# Altium PCB REMOTER.PcbDoc
Units mil, origin at the board's own origin, x right, y up, seen from the top; angles counter-clockwise.
Board outline 4330.71 x 2559.06 mil, 2 copper layers (Top Layer, Bottom Layer); 27 components, 20 nets, 135 pads, 44 vias.
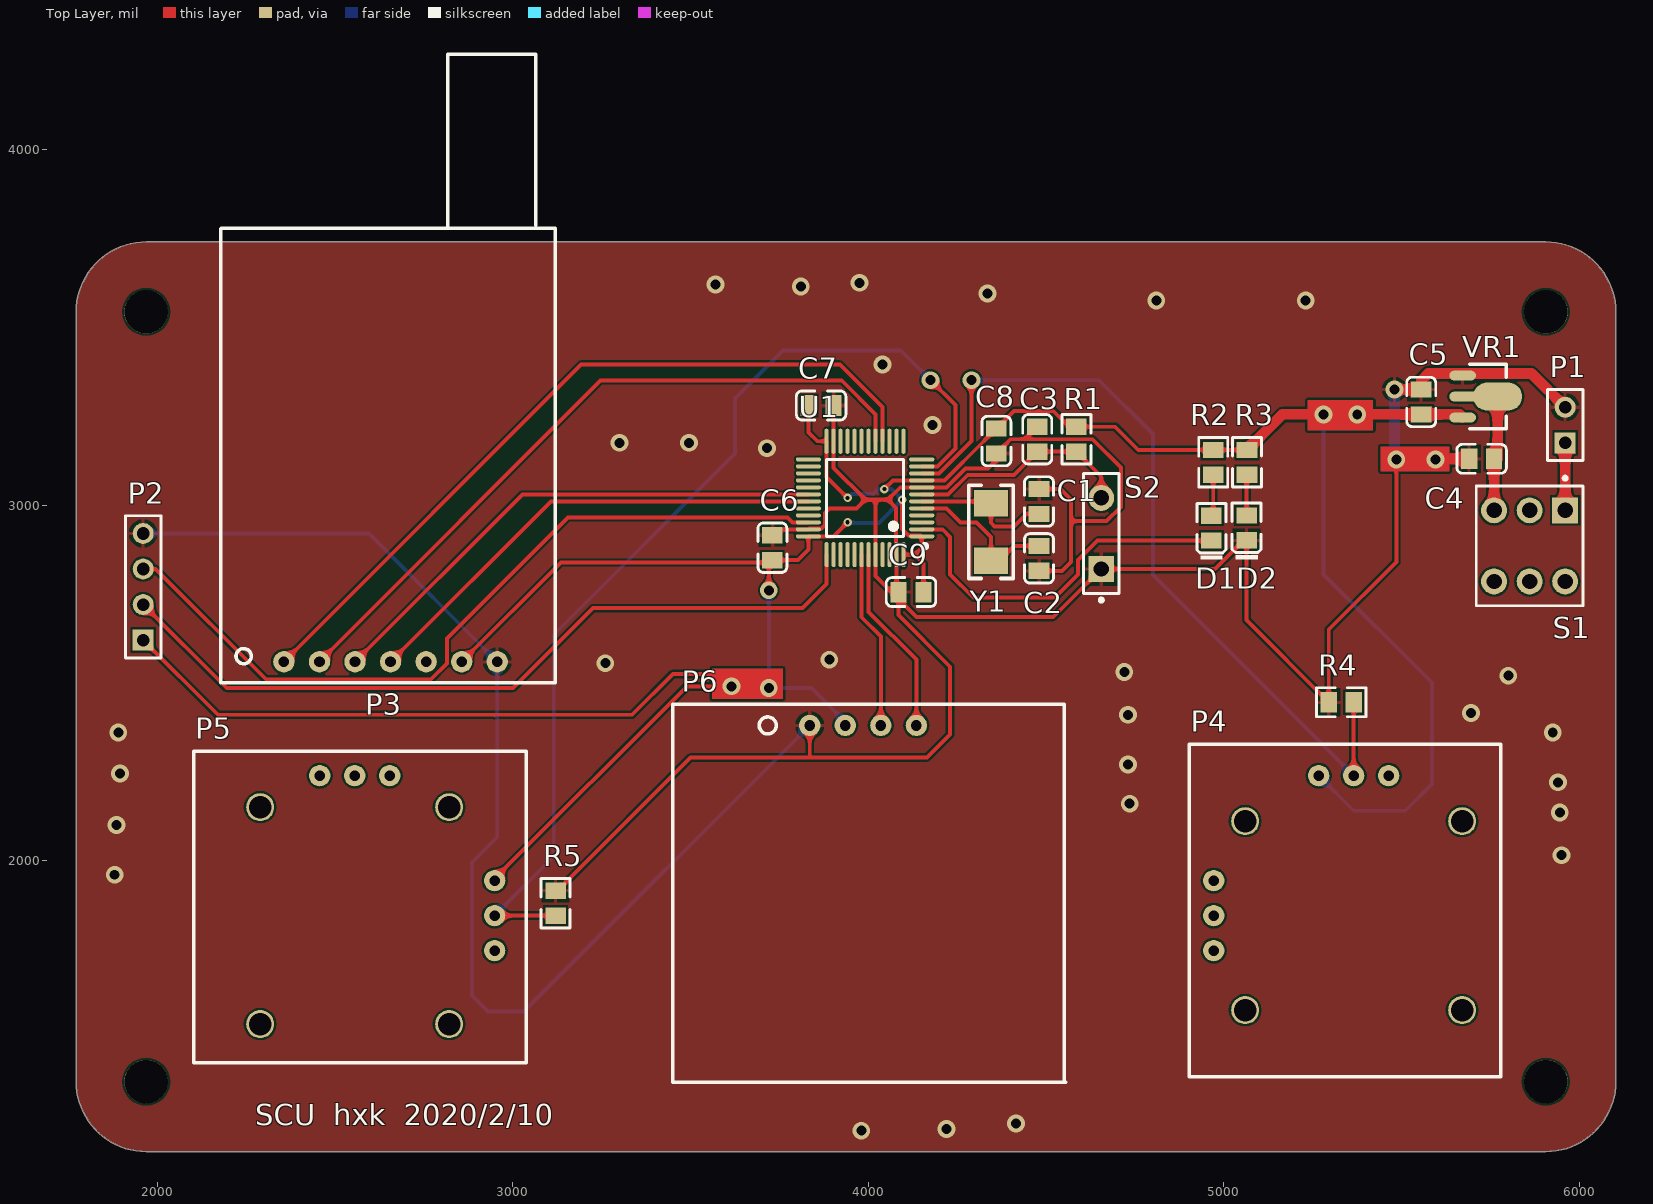
[diagram p0: Top Layer view]
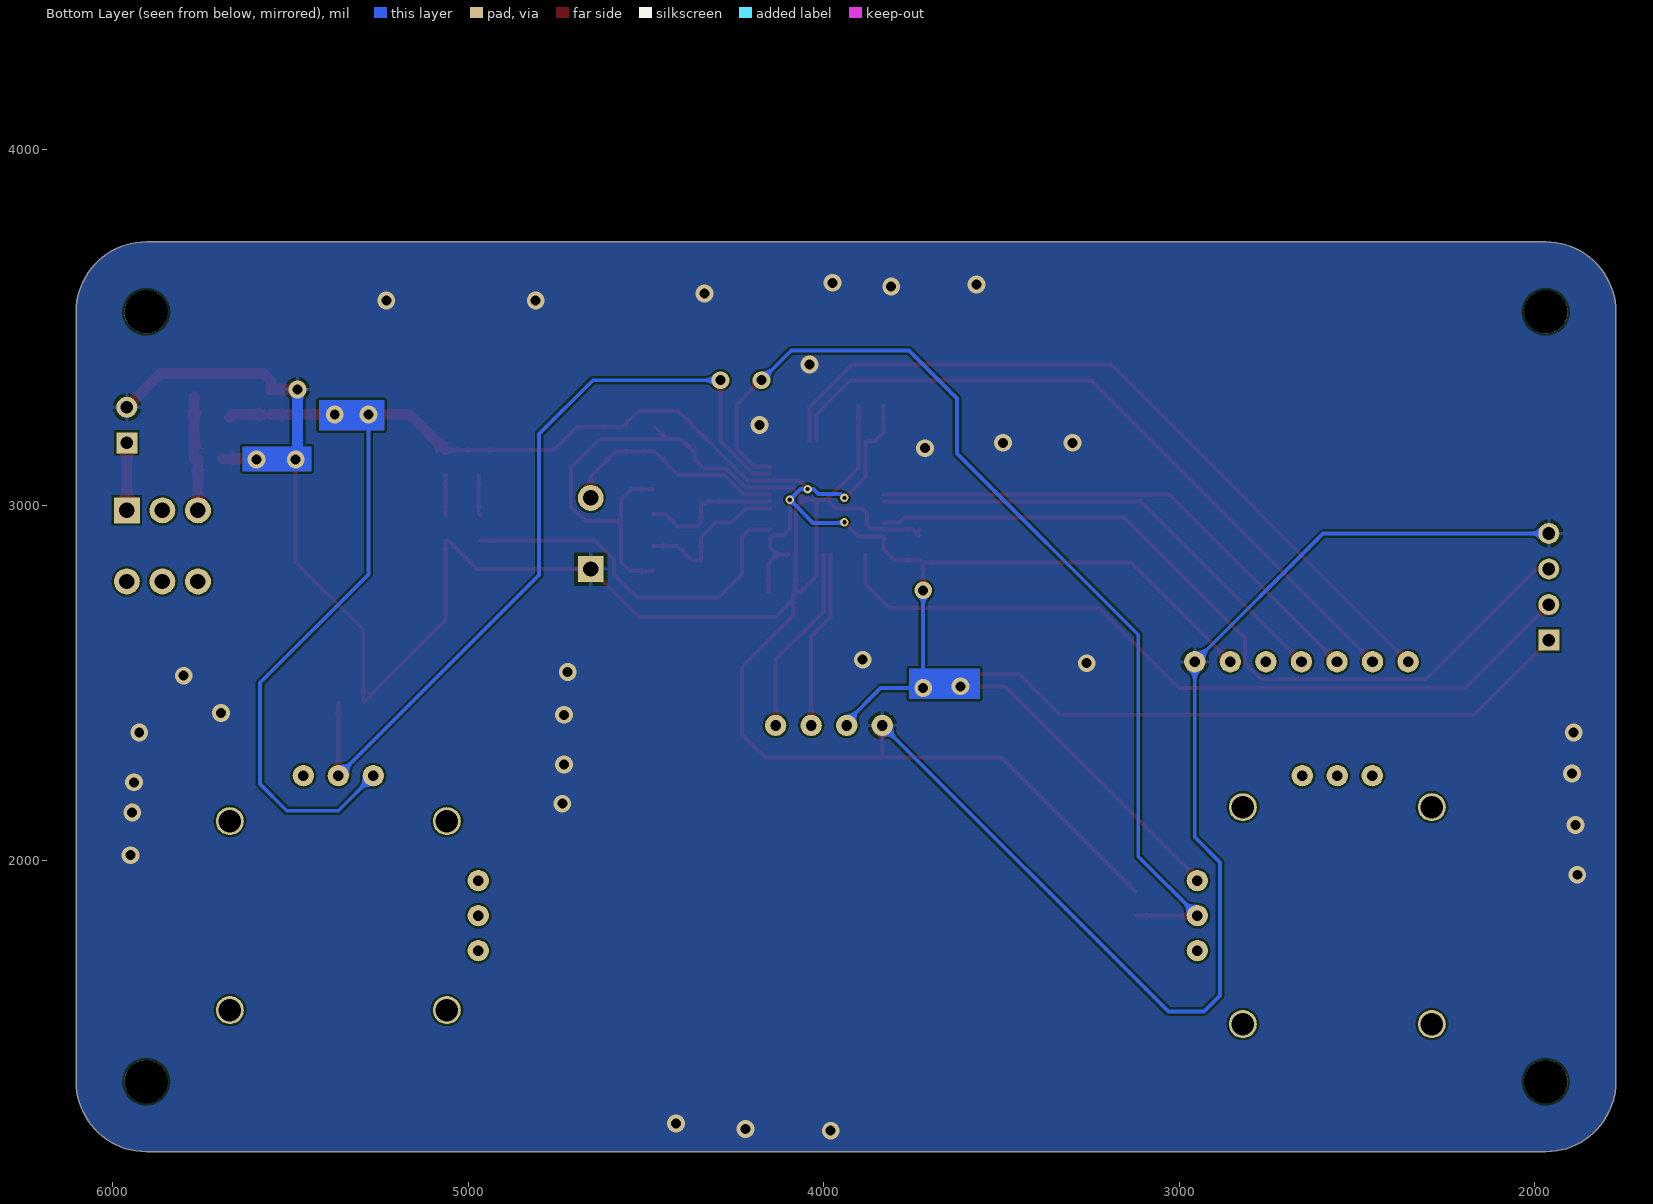
[diagram p1: Bottom Layer view, seen from below]
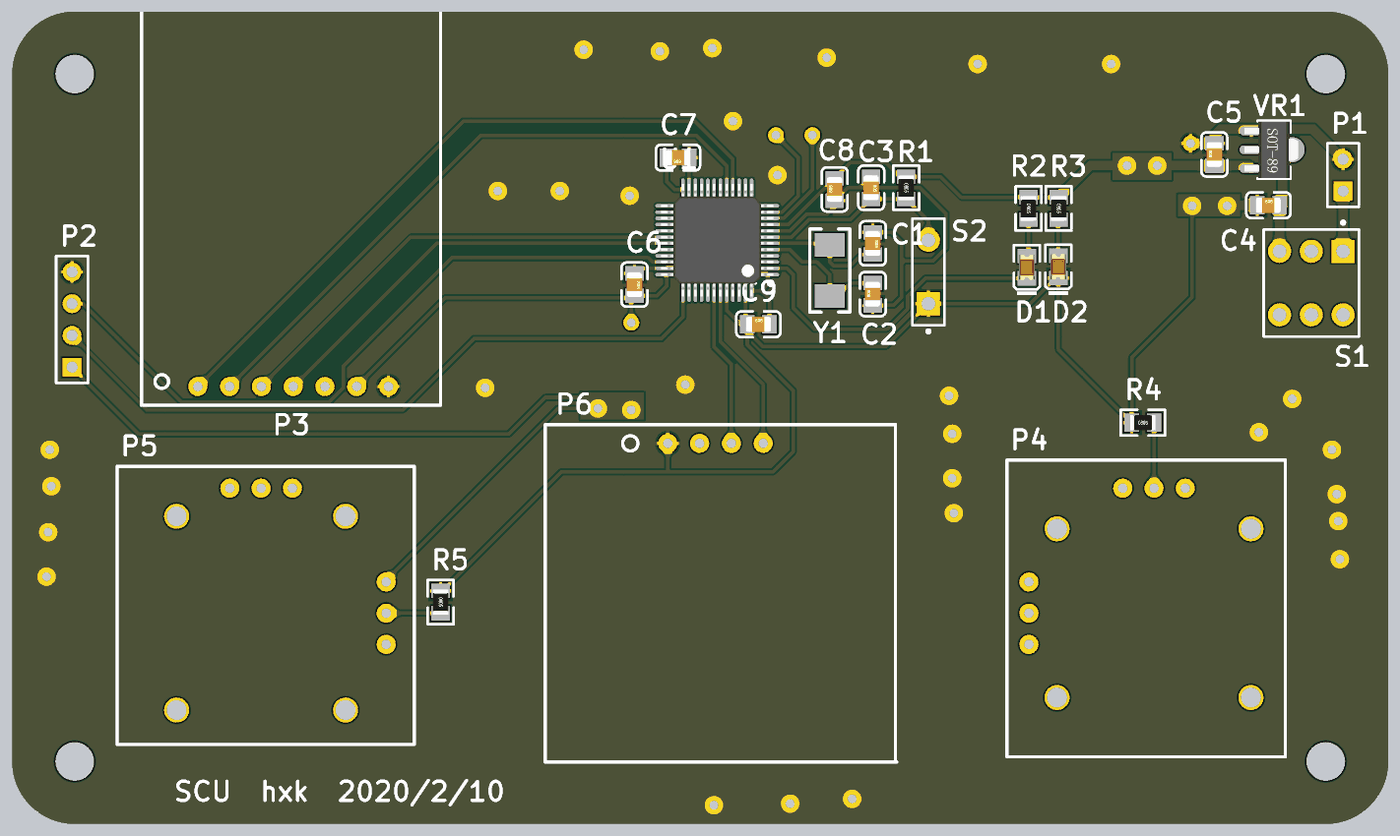
[diagram p2: 3D render of the assembled board from above, using the file's embedded part models]

## Layer stack, top to bottom
Top Solder: solder mask 0.4, Solder Resist, Dk 3.5
Top Layer: signal copper 1.4
Dielectric 1: dielectric 12.6, FR-4, Dk 4.8
Bottom Layer: signal copper 1.4
Bottom Solder: solder mask 0.4, Solder Resist, Dk 3.5

## Board outline
1771.65,1377.95 ccw(c1968.5,1377.95) 1968.5,1181.1 5905.51,1181.1 ccw(c5905.51,1377.95) 6102.36,1377.95 6102.36,3543.31 ccw(c5905.51,3543.31) 5905.51,3740.16 1968.5,3740.16 ccw(c1968.5,3543.31) 1771.65,3543.31

## Design rules (kind name [scope] priority, off if disabled: settings)
Clearance [All] p1: gap=6 ignorepadtopadclearanceinfootprint=FALSE except(0: Arc-Hole Track-Hole SMDPad-Hole THPad-Hole Via-Hole Fill-Hole Poly-Hole Region-Hole Text-Hole)
PolygonConnect [All] p1: connectstyle=Relief reliefconductorwidth=10 reliefentries=4 polygonreliefangle="90 Angle" airgapwidth=10
RoutingVias [All] p1: holewidth=28 width=50 viastyle="Through Hole" minholewidth=28 minwidth=50 maxholewidth=28 maxwidth=50
SolderMaskExpansion [All] p1: expansion=4
Width PWR [InNetClass('PWR')] p1: maxlimit=40 minlimit=8 preferedwidth=30 minimp=50.000000 maximp=50.000000 favimp=50.000000
Width [All] p2: maxlimit=30 minlimit=6 preferedwidth=11 minimp=50.000000 maximp=50.000000 favimp=50.000000
30 further rules are at their usual default settings.

## Components (designator, comment, footprint, x,y, rotation, side; value= is the part's Value field where it differs from the comment)
C1 "22pF (220) 5% 50V" 0805_C 4480,3009.96 r270 top
C2 "22pF (220) 5% 50V" 0805_C 4480,2849.96 r90 top
C3 "100nF(104) 10% 50V" 0805_C 4475,3185.04 r270 top
C4 "10uF (106) 10% 25V" 0805_C 5724.96,3130 r0 top
C5 "10uF (106) 10% 25V" 0805_C 5555,3289.96 r90 top
C6 "100nF(104) 10% 50V" 0805_C 3730,2879.96 r270 top
C7 "100nF(104) 10% 50V" 0805_C 3866.93,3280 r180 top
C8 "100nF(104) 10% 50V" 0805_C 4360,3179.96 r90 top
C9 "100nF(104) 10% 50V" 0805_C 4119.96,2755 r0 top
D1 "蓝灯 0805" 0805_LED_S1 4965,2934.96 r90 top
D2 "红灯 0805" 0805_LED_S1 5063.9,2935.72 r90 top
P1 "Battery" HDR1X2 5960,3175 r90 top
P2 "ST-LINK" HDR1X4 1960,2620 r90 top
P3 "LORA" LORA 2655.91,2559.06 r0 top
P4 "ROCKER" ROCKER 5365,1845 r270 top
P5 "ROCKER" ROCKER 2555,1845 r180 top
P6 "OLED" OLED 3835,2380 r180 top
R1 "10KΩ (1002) ±1%" 0805_R 4585,3185.04 r270 top
R2 "1KΩ (1001) ±1%" 0805_R 4970,3120.04 r270 top
R3 "1KΩ (1001) ±1%" 0805_R 5065,3120.04 r270 top
R4 "10KΩ (1002) ±1%" 0805_R 5329.96,2445 r0 top
R5 "10KΩ (1002) ±1%" 0805_R 3120,1880.04 r270 top
S1 "SW-DPDT" DPDT-6 5860,2885 r270 top
S2 "SW-PB" SPST-2 4655,2920 r90 top
U1 "STM32F103C8T6" LQFP-48_7x7x05P 3990.55,3020 r90 top
VR1 "HT7533-1" SOT-89(SOT-89-3) 5671.57,3305 r180 top
Y1 "8MHz ±20ppm 20pF" SMD-5032_2P 4344.92,2924.29 r270 top

## Footprints (in the part's own frame and the unit in brackets; to place one, negate y for a bottom-side part, rotate by r counter-clockwise, add the part's x,y. Pads: shape width x height; smd on the part's side, far side on the other; paste and mask are expansions set on the pad)
0805_C [mm]
  rect 1.16x1.47 smd: 1(-0.89,0) 2(0.89,0)
  silkscreen extent -1.77,-1.04 1.77,1.04, body extent -1,-0.62 1,0.63, height 0.77
0805_LED_S1 [mm]
  rect 1.16x1.47 smd: A(0.89,0) K(-0.89,0)
  silkscreen extent -2.24,-1.04 1.77,1.03, body extent -1.01,-0.62 1.01,0.62, height 1.1
0805_R [mm]
  rect 1.16x1.47 smd: 1(-0.89,0) 2(0.89,0)
  silkscreen extent -1.77,-1.04 1.77,1.03, body extent -1,-0.62 1,0.63, height 0.49
DPDT-6 [mm] "Switch; 6 Leads"
  rect 1.85x1.85 hole 1.1: 1(-2.54,2.54)
  round 1.85 hole 1.1: 2(-2.54,0) 3(-2.54,-2.54) 4(2.54,-2.54) 5(2.54,0) 6(2.54,2.54)
  silkscreen extent -4.96,-3.81 4.28,3.81
HDR1X2 [mm] "Connector; Header; 2 Position"
  rect 1.5x1.5 hole 0.9: 1(0,0)
  round 1.5 hole 0.9: 2(2.54,0)
  silkscreen extent -1.27,-1.27 3.81,1.27
HDR1X4 [mm] "Connector; Header; 4 Position"
  rect 1.5x1.5 hole 0.9: 1(0,0)
  round 1.5 hole 0.9: 2(2.54,0) 3(5.08,0) 4(7.62,0)
  silkscreen extent -1.27,-1.27 8.89,1.27
LORA [mil]
  round 60 hole 30: 1(-300,0) 2(-200,0) 3(-100,0) 4(0,0) 5(100,0) 6(200,0) 7(300,0)
  silkscreen extent -477,-59 464,1709
LQFP-48_7x7x05P [mm]
  oval 0.28x1.8 smd mask+0.051: 1(-2.75,-4.05) 2(-2.25,-4.05) 3(-1.75,-4.05) 4(-1.25,-4.05) 5(-0.75,-4.05) 6(-0.25,-4.05) 7(0.25,-4.05) 8(0.75,-4.05) 9(1.25,-4.05) 10(1.75,-4.05) 11(2.25,-4.05) 12(2.75,-4.05) 25(2.75,4.05) 26(2.25,4.05) 27(1.75,4.05) 28(1.25,4.05) 29(0.75,4.05) 30(0.25,4.05) 31(-0.25,4.05) 32(-0.75,4.05) 33(-1.25,4.05) 34(-1.75,4.05) 35(-2.25,4.05) 36(-2.75,4.05)
  oval 1.8x0.28 smd mask+0.051: 13(4.05,-2.75) 14(4.05,-2.25) 15(4.05,-1.75) 16(4.05,-1.25) 17(4.05,-0.75) 18(4.05,-0.25) 19(4.05,0.25) 20(4.05,0.75) 21(4.05,1.25) 22(4.05,1.75) 23(4.05,2.25) 24(4.05,2.75) 37(-4.05,2.75) 38(-4.05,2.25) 39(-4.05,1.75) 40(-4.05,1.25) 41(-4.05,0.75) 42(-4.05,0.25) 43(-4.05,-0.25) 44(-4.05,-0.75) 45(-4.05,-1.25) 46(-4.05,-1.75) 47(-4.05,-2.25) 48(-4.05,-2.75)
  silkscreen extent -3.6,-4.42 2.75,2.75, body extent -4.5,-4.5 4.5,4.5, height 1.6
OLED [mil]
  round 60 hole 30: 1(0,0) 2(-100,0) 3(-200,0) 4(-300,0)
  silkscreen extent -720,-59 386,1004
ROCKER [mm]
  round 1.524 hole 0.762: 1(-10,-2.5) 2(-10,0) ""(-10,2.5) ""(-2.5,-10) ""(0,-10) ""(2.5,-10)
  round 2 hole 1.6: ""(-6.75,7.75) ""(-6.75,-7.75) ""(6.75,7.75) ""(6.75,-7.75)
  silkscreen extent -12.25,-11.75 11.5,10.5
SMD-5032_2P [mm]
  rect 1.9x2.4 smd: 1(-2.05,0) 2(2.05,0)
  silkscreen extent -3.32,-1.6 3.32,1.6
SOT-89(SOT-89-3) [mm]
  oval 1.9x0.7 smd: 1(0,-1.5) 3(0,1.5)
  oval 3.5x2 smd: 2(-2.5,0)
  oval 2.1x0.7 smd: 2(-0.1,0)
  silkscreen extent -3.1,-2.3 -0.5,2.3, body extent -3.75,-2.25 0.55,2.25, height 1.51
SPST-2 [mm] "Switch; 2 Leads"
  rect 1.85x1.85 hole 1.1: 1(-2.54,0)
  round 1.85 hole 1.1: 2(2.54,0)
  silkscreen extent -4.89,-1.27 4.28,1.27

## Part data
C1 C2: library part "0805 22pF (220) 5% 50V", "贴片电容", Package=0805, SuppliersPartNumber=C1804, ComponentLink1Description=供应商, ComponentLink1URL=http://www.szlcsc.com/product/details_2156.html, Supplier=LC
C3 C6 C7 C8 C9: library part "0805 100nF(104) 10% 50V", "贴片电容", Package=0805, SuppliersPartNumber=C49678, ComponentLink1Description=供应商, ComponentLink1URL=http://www.szlcsc.com/product/details_50686.html, Supplier=LC
C4 C5: library part "0805 10uF (106) 10% 25V", "贴片电容", Package=0805, SuppliersPartNumber=C15850, ComponentLink1Description=供应商, ComponentLink1URL=http://www.szlcsc.com/product/details_16532.html, Supplier=LC
D1: library part "0805 蓝灯", "发光二极管", Package=0805, SuppliersPartNumber=C2293, ComponentLink1Description=供应商, ComponentLink1URL=http://www.szlcsc.com/product/details_2666.html, Supplier=LC
D2: library part "0805 红灯", "发光二极管", Package=0805, SuppliersPartNumber=C2295, ComponentLink1Description=供应商, ComponentLink1URL=http://www.szlcsc.com/product/details_2668.html, Supplier=LC
P1: library part "Header 2", "Header, 2-Pin", LatestRevisionDate=17-Jul-2002, LatestRevisionNote="Re-released for DXP Platform.", Publisher="Altium Limited"
P2: library part "Header 4", "Header, 4-Pin", LatestRevisionDate=17-Jul-2002, LatestRevisionNote="Re-released for DXP Platform.", Publisher="Altium Limited"
R1 R4 R5: library part "0805 10KΩ (1002) 1%", "贴片电阻", Package=0805, SuppliersPartNumber=C17414, ComponentLink1Description=供应商, ComponentLink1URL=http://www.szlcsc.com/product/details_18102.html, Supplier=LC
R2 R3: library part "0805 1KΩ (1001) 1%", "贴片电阻", Package=0805, SuppliersPartNumber=C17513, ComponentLink1Description=供应商, ComponentLink1URL=http://www.szlcsc.com/product/details_18201.html, Supplier=LC
S1: "Double-Pole, Double-Throw Switch", LatestRevisionDate=17-Jul-2002, LatestRevisionNote="Re-released for DXP Platform.", PackageDescription="Switch; 6 Leads", PackageReference=DPDT-6, Published=24-Mar-1999, Publisher="Altium Limited"
S2: "Switch", LatestRevisionDate=17-Jul-2002, LatestRevisionNote="Re-released for DXP Platform.", PackageDescription="Switch; 2 Leads", PackageReference=SPST-2, Published=24-Mar-1999, Publisher="Altium Limited"
U1: "ARM Cortex-M3 32-bit MCU, 64 KB Flash, 20 KB Internal RAM, 37 I/Os, 48-pin LQFP, -40 to 85 degC, Tray", I/Os (High Current)=37, Operating Frequency(F) (Processor speed) (MHz)=72, Supplier Part Number 1=497-6063-ND, Supply Voltage(Vcc) min (V)=2, A/D Converter="2x12-bit (10 Channel)", ComponentLink1Description="Manufacturer URL", ComponentLink1URL=http://www.st.com/web/en/home.html, ComponentLink2Description=Datasheet, ComponentLink2URL=http://www.st.com/st-web-ui/static/active/en/resource/technical/document/datasheet/CD00161566.pdf, ComponentLink3Description="Package Specification", ComponentLink3URL=http://www.st.com/st-web-ui/static/active/en/resource/technical/document/datasheet/DM00058181.pdf, Core="ARM Cortex-M3", DatasheetVersion="Rev. 16", FLASH Size (Prog) (kB)=64, Internal RAM Size (kB)=20, Mounting Technology="Surface Mount", PackageDescription="48-Pin Low Profile Quad Flat Package, 7 x 7 mm Body, 0.5 mm Pitch", PackageReference=LQFP48, PackageVersion="Rev. 6, 06/2013", Packing=Tray, PartNumber=STM32F103C8T6, Supplier 1=Digi-Key, Supplier 2=Farnell, Supplier 3=Newark, Supplier 4=Newark, Supplier 5=Mouser, Supplier Part Number 2=1447637, Supplier Part Number 3=59M2182, Supplier Part Number 4=57P1222, Supplier Part Number 5=511-STM32F103C8T6
VR1: library part "SOT-89 HT7533-1", "低压差线性稳压(LDO)", Package=SOT-89, SuppliersPartNumber=C14289, ComponentLink1Description=供应商, ComponentLink1URL=http://www.szlcsc.com/product/details_14949.html, Supplier=LC
Y1: library part "SMD-5032_2P 8MHz 20ppm 20pF", "贴片晶振", Package=SMD-5032_2P, SuppliersPartNumber=C115962, ComponentLink1Description=供应商, ComponentLink1URL=http://www.szlcsc.com/product/details_117214.html, Supplier=LC

## Free pads (board coordinates)
  round 122.05 hole 122.05 unplated: ""(1968.5,1377.95) ""(1968.5,3543.31) ""(5905.51,1377.95) ""(5905.51,3543.31)

## Via types
v1: diameter 50, hole 28, Top Layer to Bottom Layer, 40 vias
v2: diameter 24, hole 12, Top Layer to Bottom Layer, 4 vias

## Nets (pads, with @x,y where several pads share a name; then routed paths per layer and width w, separated by ;. In a path a pad name is that pad's centre, name@x,y a point inside that pad or via, vN(x,y) a via of type N, cw(c..) or ccw(c..) an arc to the next point about the centre after c; other vN are vias at no path point)
3V7: C4.2 S1.3 VR1.2 | length 330
  Top Layer w30: S1.3 C4.2 5770,3130 VR1.2@5770,3305
3V7_B: P1.1 S1.1 | length 190
  Top Layer w30: S1.1 P1.1
ADC1_IN0: P4.2 R4.2 U1.10 | length 2323
  Top Layer w11: U1.10 4198.9,3088.9 4290,3180 v1(4290,3351.06) ; P4.2 R4.2
  Bottom Layer w11: v1(4290,3351.06) 4648.94,3351.06 4800,3200 4800,2803.7 P4.2
ADC1_IN1: P5.2 R5.2 U1.11 | length 2884
  Top Layer w11: P5.2 R5.2 ; U1.11 4194.54,3108.58 4245,3159.04 4245,3281.06 v1(4175,3351.06)
  Bottom Layer w11: P5.2 3115,2011.3 3115,2635 3625,3145 3625,3300 3760,3435 4091.06,3435 v1(4175,3351.06)
GND: C1.1 C2.1 C3.1 C4.1 C5.2 C6.1 C7.1 C8.1 C9.1 D2.K P1.2 P2.4 P3.7 P6.1 R4.1 R5.1 S2.1 U1.8 U1.23 U1.35 U1.44 U1.47 VR1.1 | length 11251.6
  Top Layer w11: R5.1@3122.5,1912.58 3499.92,2290 3840,2290 ; C6.1 C6.1@3737.82,2922.82 ; C6.1@3730,2930.63 C6.1@3737.82,2922.82 ; C6.1@3740.63,2920 C6.1@3737.82,2922.82 ; P6.1 3835,2295 3840,2290 ; C7.1 U1.23 3901.97,3104.37 3991.34,3015 ; C3.1 4439.92,3185 ; C2.1 4544.92,2814.92 4570,2840 4570,2955 ; C1.1 4540,3045 4570,3015 4570,2955 ; v1(5485,3128.27) 5485,2840 5294.92,2649.92 R4.1 5063.9,2676.02 D2.K 5055.69,2900.69 4975,2820 S2.1 4520,2685 4135,2685 C9.1@4084.92,2735.08 ; C6.1@3737.82,2922.82 3746.42,2931.42 U1.35 3833.78,2934.09 3868.07,2934.09 3878.04,2944.06 3878.04,2977.83 3877.78,2978.09 3890.16,2990.47 3966.81,2990.47 3991.34,3015 ; 3840,2290 4165,2290 4230,2355 4230,2545 4084.92,2690.08 C9.1@4084.92,2735.08 ; 3991.34,3015 4020.08,3015 ; 4020.08,3015 4055,3015 ; 4020.08,3015 U1.44 4020.08,2799.92 4065,2755 C9.1 ; 4055,3015 4078,2992 4078,2861.69 U1.47 4079.13,2760.79 C9.1 ; 4055,3015 4089.53,3049.53 U1.8 4220,3049.53 4272.74,3102.26 4337.26,3102.26 4360,3125 C8.1 4400.08,3185 4439.92,3185 ; C9.1@4084.92,2735.08 C9.1 ; 4439.92,3185 4630,3185 4710,3105 4710,2995 4670,2955 4570,2955
  Top Layer w30: v1(5480,3325) C5.2 5555,3350 5575,3370 5865,3370 P1.2 P1.2@5956,3275 ; v1@5605,3130 C4.1
  Bottom Layer w11: P2.4 2594.96,2920 P3.7 2955.91,2065.91 2885,1995 2885,1620 2930,1575 3030,1575 P6.1
  Bottom Layer w30: v1(5480,3325) 5480,3133.27 v1(5485,3128.27) ; P1.2@5960,3264 P1.2
  other v1: 3980,1240 4220,1245 4415,1260 1880,1960 5950,2015 1885,2100 5945,2135 4735,2160 5940,2220 1895,2245 4730,2270 1890,2360 5925,2360 4730,2410 5695,2415 5800,2520 4720,2530 3260,2555 3890,2565 5595,3128.27 3715,3160 3300,3175 3495,3175 4180,3225 4040,3395 4810,3575 5230,3575 4335,3595 3810,3615 3570,3620 3975,3625
I2C1_SCL: P6.3 U1.42 | length 503
  Top Layer w11: U1.42 3980.71,2684.29 4035,2630 P6.3
I2C1_SDA: P6.4 U1.43 | length 536.3
  Top Layer w11: U1.43 4000.39,2699.61 4135,2565 P6.4
M0: P3.1 U1.16 | length 2175.5
  Top Layer w11: P3.1 3191.85,3395 3920,3395 4039.76,3275.24 U1.16
M1: P3.2 U1.17 | length 2006.6
  Top Layer w11: P3.2 3246.85,3350 3925,3350 4020.08,3254.92 U1.17
NetD1_A: D1.A R2.2 | length 117.1
  Top Layer w11: D1.A 4970,2975 R2.2
NetD2_A: D2.A R3.2 | length 114.7
  Top Layer w11: D2.A 5063.9,3083.9 R3.2
NRST: C3.2 R1.2 S2.2 U1.7 | length 643.8
  Top Layer w11: U1.7 4224.36,3029.84 4279.51,3085 4410,3085 C3.2 R1.2 4655,3080 S2.2
OSC_IN: C2.2 U1.5 Y1.2 | length 447
  Top Layer w11: U1.5 4219.53,2990.47 4258.9,2951.1 4303.9,2951.1 4344.92,2910.08 Y1.2 4368.58,2843.58 4410,2885 C2.2
OSC_OUT: C1.2 U1.6 Y1.1 | length 405.7
  Top Layer w11: U1.6 4329.84,3010.16 4335,3005 Y1.1 4344.92,2950.08 4355,2940 4410,2940 4444.92,2974.92 C1.2
PC13: D1.K U1.2 | length 1045.8
  Top Layer w11: U1.2 4209.21,2931.42 4230,2910.63 4230,2805 4295,2740 4525,2740 4590,2805 4590,2845 4644.92,2899.92 D1.K
SWCLK: P2.2 U1.37 | length 2224
  Top Layer w11: P2.2 2195,2485 3000,2485 3225,2710 3815,2710 3882.28,2777.28 U1.37
SWDIO: P2.3 U1.34 | length 2234.7
  Top Layer w11: P2.3 1995,2820 2305,2510 2770,2510 2814.41,2554.41 2814.41,2624.41 3154.96,2964.96 3772.98,2964.96 3786.84,2951.1 U1.34
USART1_RX: P3.4 U1.31 | length 1362
  Top Layer w11: P3.4 3107.01,3010.16 U1.31
USART1_TX: P3.3 U1.30 | length 1470.2
  Top Layer w11: P3.3 3026.69,3029.84 U1.30
VCC: C5.1 C6.2 C7.2 C8.2 C9.2 P2.1 P3.6 P4.1 P5.1 P6.2 R1.1 R2.1 R3.1 U1.1 U1.9 U1.24 U1.36 U1.48 VR1.3 | length 9077.4
  Top Layer w11: P2.1 2170,2410 2950,2410 ; P3.6 3135,2838.15 C6.2@3723.23,2838.15 ; P5.1 2948.7,1949.41 3489.29,2490 v1(3615,2490) ; 2948.7,2408.7 2950,2410 ; v1@3720,2490 v1(3720,2485) 3715,2490 v1(3615,2490) ; v1(3720,2760) 3720,2834.92 C6.2@3723.23,2838.15 ; C7.2 3831.89,3204.21 3856.65,3179.45 U1.24 3882.28,3079.06 v2(3941.34,3020) ; v2(3941.34,2951.42) 3901.65,2911.73 U1.36 3831.1,2874.37 3801.65,2844.92 C6.2 C6.2@3723.23,2838.15 ; v2(4045,3045) 4069.21,3069.21 U1.9 4214.21,3069.21 4251.73,3106.73 4285,3140 C8.2 4410,3265 4520,3265 4564.92,3220.08 R1.1 4694.13,3220.08 4759.13,3155.08 R2.1 R3.1 ; v2(4095,3015) 4095,2932.44 4113.03,2914.41 4147.33,2914.41 U1.1 4150,2880.55 4130,2860.55 ; U1.48 4130,2860.55 ; C9.2 4155,2835.55 4130,2860.55 ; 2950,2410 3335,2410 3450,2525 3580,2525 v1(3615,2490)
  Top Layer w30: R3.1 5164.84,3254.92 v1(5280.08,3254.92) v1(5375.08,3254.92) C5.1 ; C5.1@5576.07,3254.92 5662.6,3254.92 VR1.3
  Bottom Layer w11: v1(3720,2760) v1(3720,2485) 3840,2485 3935,2390 P6.2 ; v2(3941.34,2951.42) 3942.76,2950 4030,2950 v2(4095,3015) 4065,3045 v2(4045,3045) 4028.23,3045 4014.73,3031.5 3952.84,3031.5 v2(3941.34,3020) ; P4.1 5365.28,2140 5510,2140 5585,2215 5585,2500 5280.08,2804.92 v1(5280.08,3254.92)
pads on no net: P3.5 P4. P5. S1.2 S1.4 S1.5 S1.6 U1.3 U1.4 U1.12 U1.13 U1.14 U1.15 U1.18 U1.19 U1.20 U1.21 U1.22 U1.25 U1.26 U1.27 U1.28 U1.29 U1.32 U1.33 U1.38 U1.39 U1.40 U1.41 U1.45 U1.46

## Polygon pours and split planes (outlines as drawn)
GND on Top Layer "Top Layer-No Net1" (solid, remove dead copper, pour order 6): 1771.65,1377.95 ccw(c1968.5,1377.95) 1968.5,1181.1 5905.51,1181.1 ccw(c5905.51,1377.95) 6102.36,1377.95 6102.36,3543.31 ccw(c5905.51,3543.31) 5905.51,3740.16 1968.5,3740.16 ccw(c1968.5,3543.31) 1771.65,3543.31
no net on Top Layer "Top Layer-No Net 1" (solid, pour order 10): 4005,3107.98
no net on Top Layer "Top Layer-No Net" (solid, pour order 2): 5890,3080
GND on Bottom Layer "Top Layer-No Net2" (solid, remove dead copper, pour order 7): 1771.65,1377.95 ccw(c1968.5,1377.95) 1968.5,1181.1 5905.51,1181.1 ccw(c5905.51,1377.95) 6102.36,1377.95 6102.36,3543.31 ccw(c5905.51,3543.31) 5905.51,3740.16 1968.5,3740.16 ccw(c1968.5,3543.31) 1771.65,3543.31

## Other copper
Top Layer:
  rectangle net VCC: 3560,2455 3760,2540
  rectangle net VCC: 5235,3210 5420,3295
  rectangle net GND: 5440,3095 5635,3165
  pour cut-out: 3976.22,3110.26 4003.75,3082.73 4016.74,3082.73 4016.74,3110 4015.27,3111.47 3994.47,3111.47 4020,3085.94 4032.02,3097.96 4032.02,3106.73 4009.67,3106.73 3995,3092.06 3995,3109.23 3980.77,3109.23 3980,3110
Bottom Layer:
  rectangle net VCC: 3560,2455 3760,2540
  rectangle net VCC: 5235,3210 5420,3295
  rectangle net GND: 5440,3095 5635,3165

## Silkscreen, mask and mechanical layers (free items; w line width, h text height)
Top Overlay:
  text "SCU  hxk  2020/2/10" at 2275,1255 h60
Mechanical 1:
  pour cut-out: 3917.01,3137.79 4102.99,3137.79 4102.99,3082.73 4105.68,3080.04 4066.57,3082.73 4042.61,3065.33 4026.65,3053.72 4026.65,3025.83 3997.02,3025.83 3914.51,3108.33 3913.37,3108.33 3913.37,3134.16
  lines w10: 1771.65,1377.95 ccw(c1968.5,1377.95) 1968.5,1181.1 5905.51,1181.1 ccw(c5905.51,1377.95) 6102.36,1377.95 6102.36,3543.31 ccw(c5905.51,3543.31) 5905.51,3740.16 1968.5,3740.16 ccw(c1968.5,3543.31) 1771.65,3543.31 1771.65,1377.95